# EAGLE board LiFePo4 Charger (EAGLE 6.2)

Size 40 x 70 mm. Coordinates in mm from the lower left corner, seen from the top.
Outline: 0,0 40,0 40,70 0,70 0,0
Copper layers (1*16): Top 0.035mm / dielectric 1.5mm / Bottom 0.035mm
Design rules: minimum track width 10mil, minimum drill 24mil, track to track 8mil, track to pad 8mil, pad to pad 8mil, via to via 8mil, smd to smd 8mil, copper to edge 40mil, drill to drill 8mil, minimum pad ring 10mil, minimum via ring 8mil, stop-mask expansion 4mil, vias tented up to drill 0mil, thermal gap 10mil

## Footprints (pad centres in the part's own frame; a part is rotated, then mirrored left to right if it is on the bottom)
EIA3216-KIT = smd 1.9 x 1.6: A 1.65,0; C -1.65,0
TO-220-ALT = drill 1.016 long: GND 0,-3.81; IN -2.54,-3.81; OUT 2.54,-3.81 | hole 3.302: 0,11.176
1X02 = drill 1.016 pad 1.88: 1 0,0; 2 2.54,0
SMARTLED-TTW = smd 0.8 x 0.5: A 0,-0.875; C 0,0.875 | smd 0.35 x 0.35: A@1 0,-0.5; C@1 0,0.5
SMK = smd 2.5 x 2: 1 1.524,0; 2 -1.524,0
MCP73123/223 = smd 0.5 x 0.3: 1 1.47,-1.67; 2 1.47,-2.22; 3 1.47,-2.77; 4 1.47,-3.32; 5 1.47,-3.87; 6 4.07,-3.87; 7 4.07,-3.32; 8 4.07,-2.77; 9 4.07,-2.22; 10 4.07,-1.67

## Placement (x,y rotation side)
C3  4.7  [EIA3216-KIT]  20.11,48.89 180 top
IC1  5v  [TO-220-ALT]  8.46,38.91 180 top
JP1  Bat+  [1X02]  24.45,59.39 90 top
JP2  Bat-  [1X02]  13.32,65.62 180 top
JP3  Vraw/Grnd  [1X02]  27.3,53.59 180 bottom
LED1  250mcd  [SMARTLED-TTW]  3.57,56.09 0 top
R1  1.5k  [SMK]  9.13,59.57 180 top
R2  1k  [SMK]  21.65,67.77 0 top
U$8  MCP73123/223  [MCP73123/223]  10.75,52.43 90 top

## Library data of the parts
C3 IC1 JP1-JP3 = SparkFun
LED1 = led
R1 R2 = resistor-shunt; OC_FARNELL: unknown; OC_NEWARK: unknown
U$8 = untitled

## Nets
GND: C3.C IC1.GND JP3.1
N$1: IC1.IN JP3.2
N$2: C3.A IC1.OUT LED1.A@1 U$8.1 U$8.2
N$3: JP1.1 JP1.2 U$8.3 U$8.4
N$4: R1.1 U$8.10
N$5: JP2.1 JP2.2 R1.2 U$8.8 U$8.9
N$6: LED1.C@1 R2.2
N$7: R2.1 U$8.7

## Tracks (layer width: path | path; a pad name or v marks a point on that pad's centre or on a via)
GND  (2 unrouted)
N$1  (1 unrouted)
N$2  (4 unrouted)
N$3  (3 unrouted)
N$4  (1 unrouted)
N$5  (4 unrouted)
N$6  (1 unrouted)
N$7  (1 unrouted)